# Altium PCB PCB1.PcbDoc
Units mm, origin at the board's own origin, x right, y up, seen from the top; angles counter-clockwise.
Board outline 35.69 x 36.96 mm, 2 copper layers (Top Layer, Bottom Layer); 6 components, 13 nets, 31 pads, 0 vias.
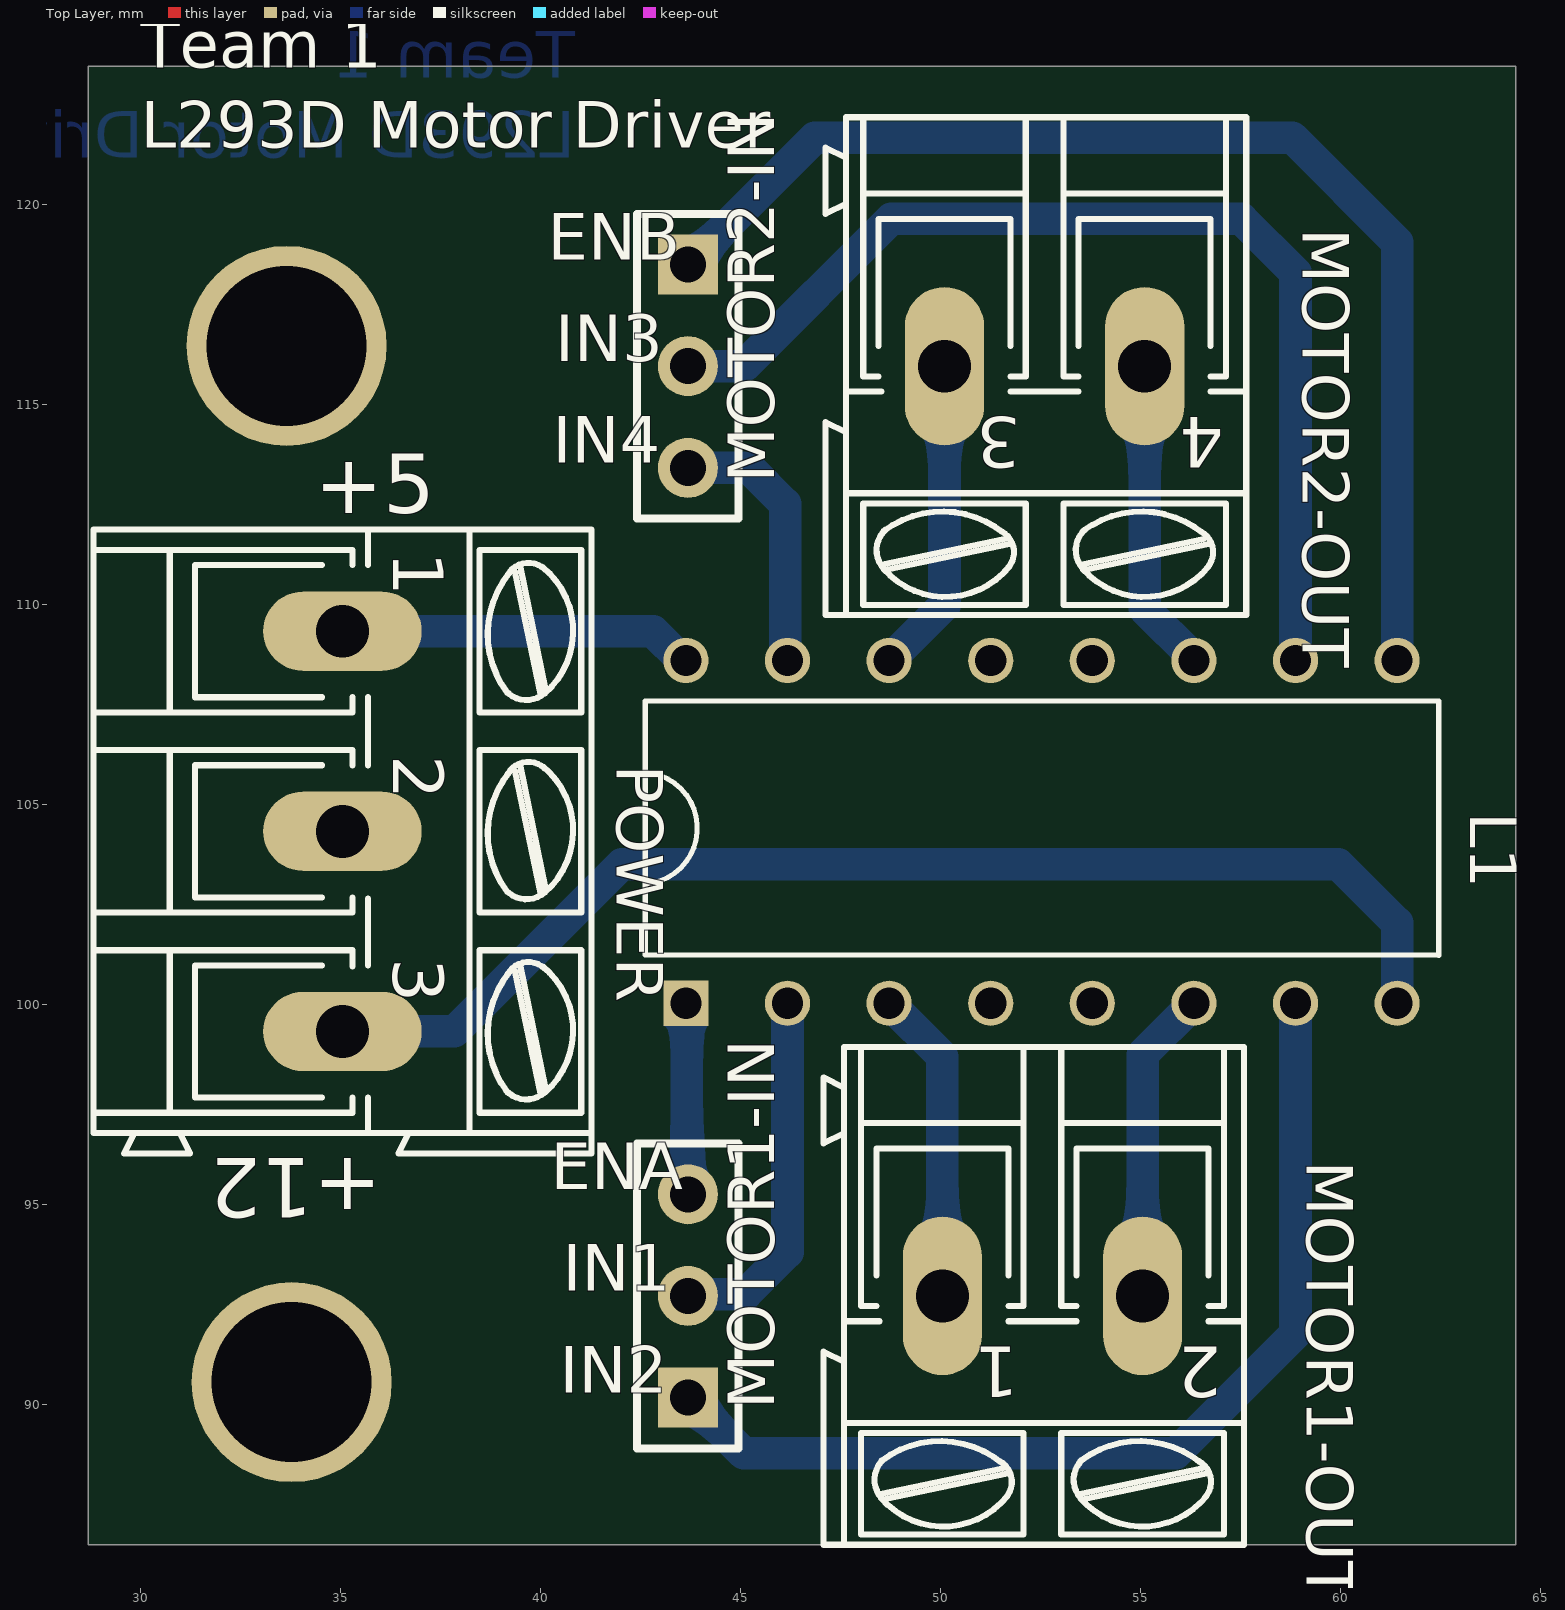
[diagram p0: Top Layer view]
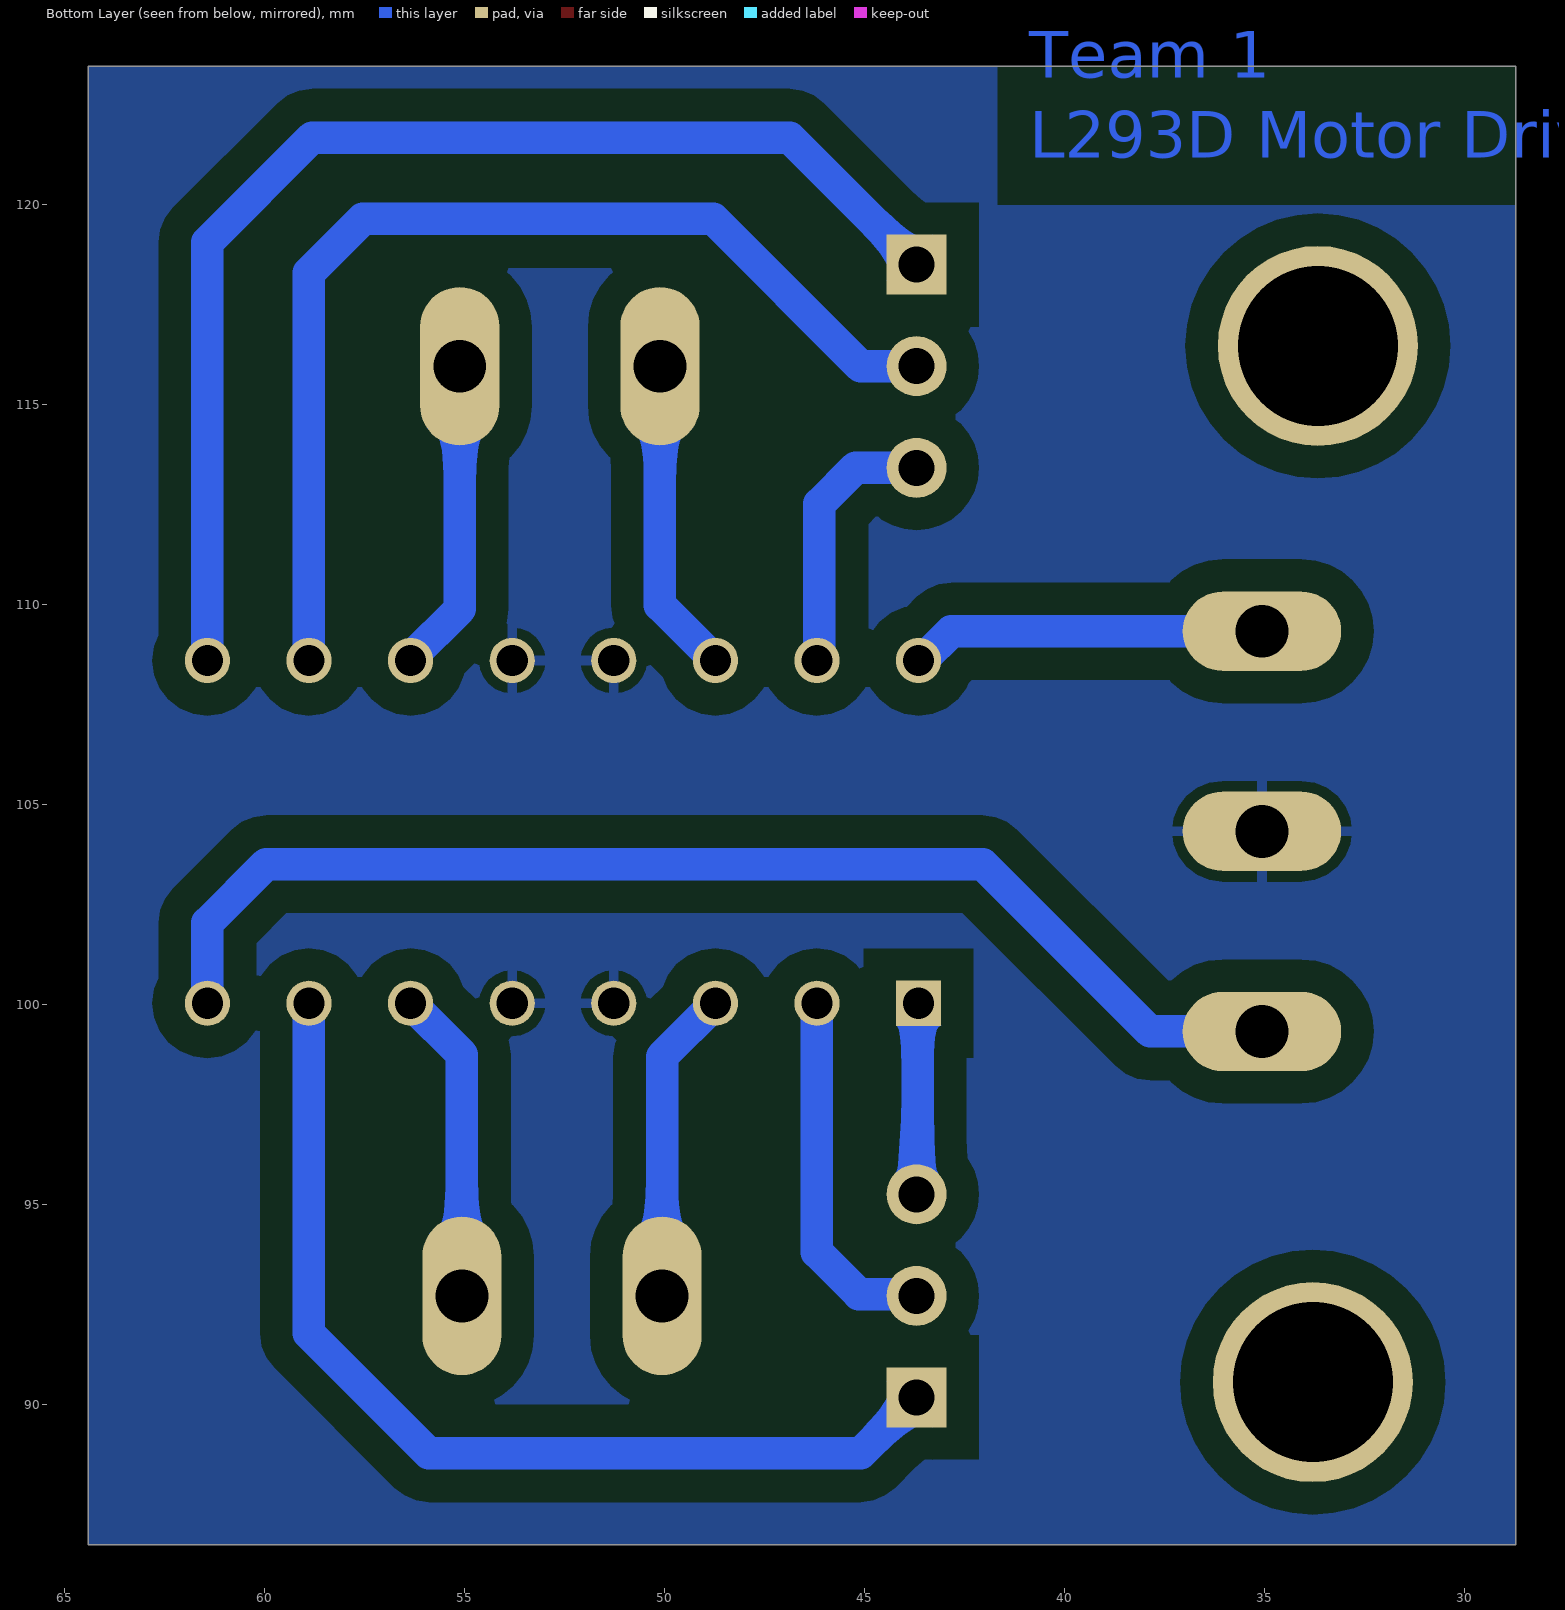
[diagram p1: Bottom Layer view, seen from below]
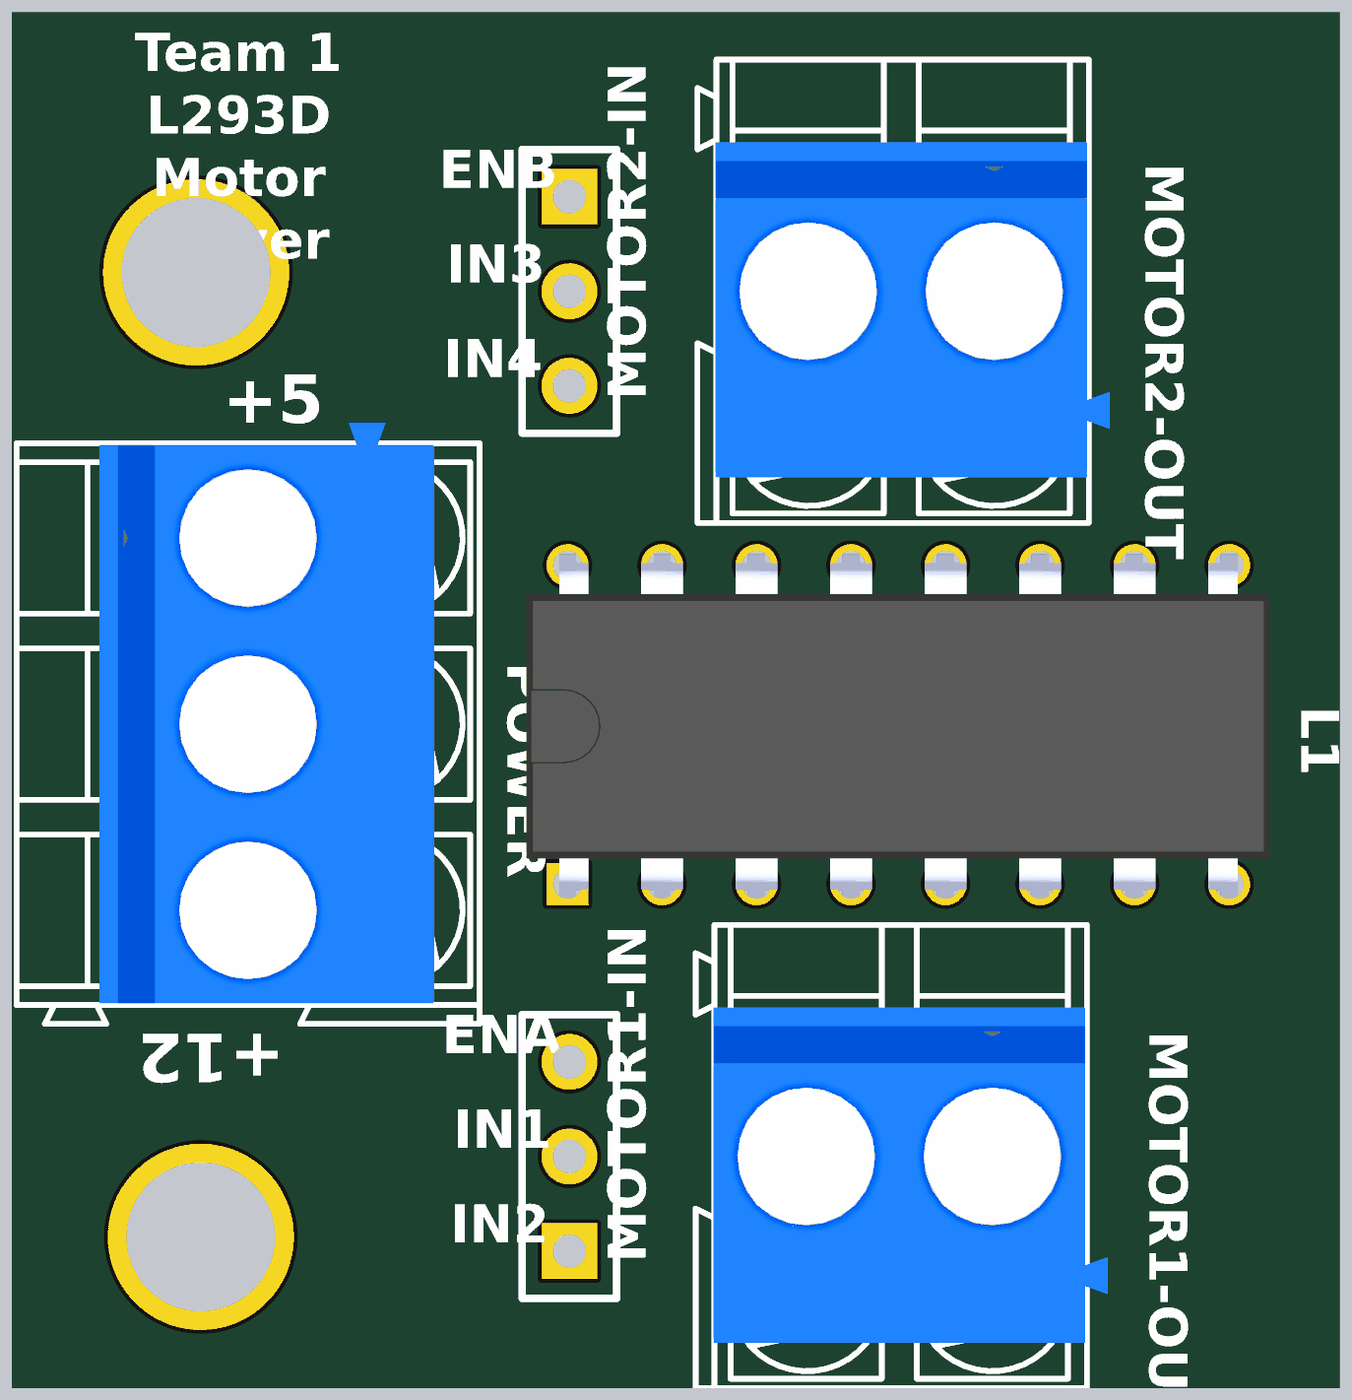
[diagram p2: 3D render of the assembled board from above, using the file's embedded part models]

## Layer stack, top to bottom
Top Solder: solder mask 0.0102, Solder Resist, Dk 3.5
Top Layer: signal copper 0.0356
Dielectric 1: dielectric 0.32, FR-4, Dk 4.8
Bottom Layer: signal copper 0.0356
Bottom Solder: solder mask 0.0102, Solder Resist, Dk 3.5

## Board outline
28.702,86.487 64.389,86.487 64.389,123.444 28.702,123.444

## Design rules (kind name [scope] priority, off if disabled: settings)
Clearance B_GND [InNamedPolygon('B_GND')] p1: gap=0.8 ignorepadtopadclearanceinfootprint=FALSE
Clearance [All] p2: gap=0.8 ignorepadtopadclearanceinfootprint=FALSE
PolygonConnect [All] p1: connectstyle=Relief reliefconductorwidth=0.254 reliefentries=4 polygonreliefangle="90 Angle" airgapwidth=0.254
RoutingLayers [All] p1: top layer_v5=FALSE bottom layer_v5=TRUE
RoutingVias [All] p1: holewidth=0.711 width=1.27 viastyle="Through Hole" minholewidth=0.711 minwidth=1.27 maxholewidth=0.711 maxwidth=1.27
SolderMaskExpansion [All] p1: expansion=0.102 istentingtop=FALSE
UnRoutedNet [All] p1: checkbadconnections=TRUE
Width [All] p1: maxlimit=0.813 minlimit=0.813 preferedwidth=0.813
28 further rules are at their usual default settings.

## Components (designator, comment, footprint, x,y, rotation, side; value= is the part's Value field where it differs from the comment)
L1 "L293D" L293D 52.197,104.648 r90 top
MOTOR1-IN "" HDR1X3 43.688,90.17 r90 top
MOTOR1-OUT "" AK300/2 50.05,92.71 r180 top
MOTOR2-IN "" HDR1X3 43.688,118.491 r270 top
MOTOR2-OUT "" AK300/2 50.102,115.951 r180 top
POWER "" AK300/3 35.052,104.323 r270 top

## Footprints (in the part's own frame and the unit in brackets; to place one, negate y for a bottom-side part, rotate by r counter-clockwise, add the part's x,y. Pads: shape width x height; smd on the part's side, far side on the other; paste and mask are expansions set on the pad)
AK300/2 [mil]
  oval 78x156 hole 52: 1(-197,0) 2(0,0)
  silkscreen extent -297,-245 117,245, body extent -319,-157 98,197, height 496
AK300/3 [mil]
  oval 78x156 hole 52: 1(-197,0) 2(0,0) 3(197,0)
  silkscreen extent -297,-245 317,245, body extent -319,-157 295,197, height 496
HDR1X3 [mm] "Connector; Header; 3 Position"
  rect 1.5x1.5 hole 0.9: 1(0,0)
  round 1.5 hole 0.9: 2(2.54,0) 3(5.08,0)
  silkscreen extent -1.27,-1.27 6.35,1.27
L293D [mm]
  rect 1.13x1.13 hole 0.78: ENA(-4.623,8.56)
  round 1.13 hole 0.78: ENB(3.945,-9.22) GND(-4.623,-1.6) GND(-4.623,0.94) GND(3.945,-1.6) GND(3.945,0.94) IN1(-4.623,6.02) IN2(-4.623,-6.68) IN3(3.945,-6.68) IN4(3.945,6.02) OUT1(-4.623,3.48) OUT2(-4.623,-4.14) OUT3(3.945,-4.14) OUT4(3.945,3.48) VS(-4.623,-9.22) VSS(3.945,8.56)
  silkscreen extent -3.43,-10.26 2.93,9.58, body extent -5,-10.33 4.24,9.67, height 6.37

## Part data
MOTOR1-IN MOTOR2-IN: library part "Header 3", "Header, 3-Pin", LatestRevisionDate=17-Jul-2002, LatestRevisionNote="Re-released for DXP Platform.", Publisher="Altium Limited"
MOTOR1-OUT MOTOR2-OUT: library part AK300/2, Package=None, Availability=Unavailable, Check_prices=https://www.snapeda.com/parts/AK300/3/Altech/view-part/2748485/?ref=eda, MF=Altech, MP=AK300/3, Price=None, SnapEDA_Link=https://www.snapeda.com/parts/AK300/3/Altech/view-part/2748485/?ref=snap
POWER: library part AK300/3, Package=None, Availability=Unavailable, Check_prices=https://www.snapeda.com/parts/AK300/3/Altech/view-part/2748485/?ref=eda, MF=Altech, MP=AK300/3, Price=None, SnapEDA_Link=https://www.snapeda.com/parts/AK300/3/Altech/view-part/2748485/?ref=snap

## Free pads (board coordinates)
  round 5 hole 4 unplated: ""(33.655,116.459) ""(33.782,90.551)

## Nets (pads, with @x,y where several pads share a name; then routed paths per layer and width w, separated by ;. In a path a pad name is that pad's centre, name@x,y a point inside that pad or via, vN(x,y) a via of type N, cw(c..) or ccw(c..) an arc to the next point about the centre after c; other vN are vias at no path point)
+5: L1.VSS POWER.1 | length 8.9
  Bottom Layer w0.813: POWER.1 42.817,109.327 43.551,108.593 L1.VSS
+12: L1.VS POWER.3 | length 30.7
  Bottom Layer w0.813: POWER.3 37.851,99.319 42.037,103.505 59.944,103.505 61.417,102.032 L1.VS
ena: L1.ENA MOTOR1-IN.3 | length 4.8
  Bottom Layer w0.813: L1.ENA 43.663,100 43.663,95.275 MOTOR1-IN.3
enb: L1.ENB MOTOR2-IN.1 | length 30.6
  Bottom Layer w0.813: MOTOR2-IN.1 46.863,121.666 58.801,121.666 61.417,119.05 L1.ENB
GND: L1.GND POWER.2
in1: L1.IN1 MOTOR1-IN.2 | length 9.2
  Bottom Layer w0.813: MOTOR1-IN.2 43.731,92.753 45.128,92.753 46.177,93.802 L1.IN1
in2: L1.IN2 MOTOR1-IN.1 | length 25.3
  Bottom Layer w0.813: MOTOR1-IN.1 45.085,88.773 55.88,88.773 58.877,91.77 L1.IN2
in3: L1.IN3 MOTOR2-IN.2 | length 27
  Bottom Layer w0.813: MOTOR2-IN.2 45.085,115.951 48.768,119.634 57.531,119.634 58.877,118.288 L1.IN3
in4: L1.IN4 MOTOR2-IN.3 | length 6.7
  Bottom Layer w0.813: MOTOR2-IN.3 45.212,113.411 46.117,112.506 46.117,108.653 L1.IN4
NetL1_OUT1: L1.OUT1 MOTOR1-OUT.2 | length 7.9
  Bottom Layer w0.813: L1.OUT1 50.05,98.692 MOTOR1-OUT.2
NetL1_OUT2: L1.OUT2 MOTOR1-OUT.1 | length 7.8
  Bottom Layer w0.813: MOTOR1-OUT.1 55.054,98.742 L1.OUT2
NetL1_OUT3: L1.OUT3 MOTOR2-OUT.1 | length 7.9
  Bottom Layer w0.813: MOTOR2-OUT.1 55.106,109.884 56.337,108.653 L1.OUT3
NetL1_OUT4: L1.OUT4 MOTOR2-OUT.2 | length 7.9
  Bottom Layer w0.813: L1.OUT4 50.102,109.977 MOTOR2-OUT.2

## Polygon pours and split planes (outlines as drawn)
GND on Bottom Layer "B_GND" (solid, remove dead copper, pour order 0): 28.702,86.487 64.389,86.487 64.389,123.444 28.702,123.444

## Other copper
Bottom Layer:
  text "Team 1 / L293D Motor Driver" at 40.873,120.769 h2

## Silkscreen, mask and mechanical layers (free items; w line width, h text height)
Top Overlay:
  text "Team 1 / L293D Motor Driver" at 30.006,121.02 h2
  text "ENB" at 40.182,118.23 h2
  text "IN3" at 40.373,115.691 h2
  text "IN4" at 40.303,113.152 h2
  text "+5" at 34.359,111.783 h2.54
  text "+12" at 36.035,96.639 h2.54 r180
  text "ENA" at 40.262,94.991 h2
  text "IN1" at 40.56,92.451 h2
  text "IN2" at 40.48,89.904 h2

## Text inside footprints (layer, text, board x,y; h text height)
MOTOR1-OUT: Top Overlay "2" at 57.035,91.44 h1.27 r180; Top Overlay "1" at 51.955,91.44 h1.27 r180
MOTOR2-OUT: Top Overlay "3" at 52.007,114.681 h1.27 r180; Top Overlay "4" at 57.087,114.681 h1.27 r180
POWER: Top Overlay "2" at 36.322,106.228 h1.27 r270; Top Overlay "1" at 36.322,111.308 h1.27 r270; Top Overlay "3" at 36.322,101.148 h1.27 r270